# EAGLE board ADK_MEGA_2560-REV3 (EAGLE 7.2.0)
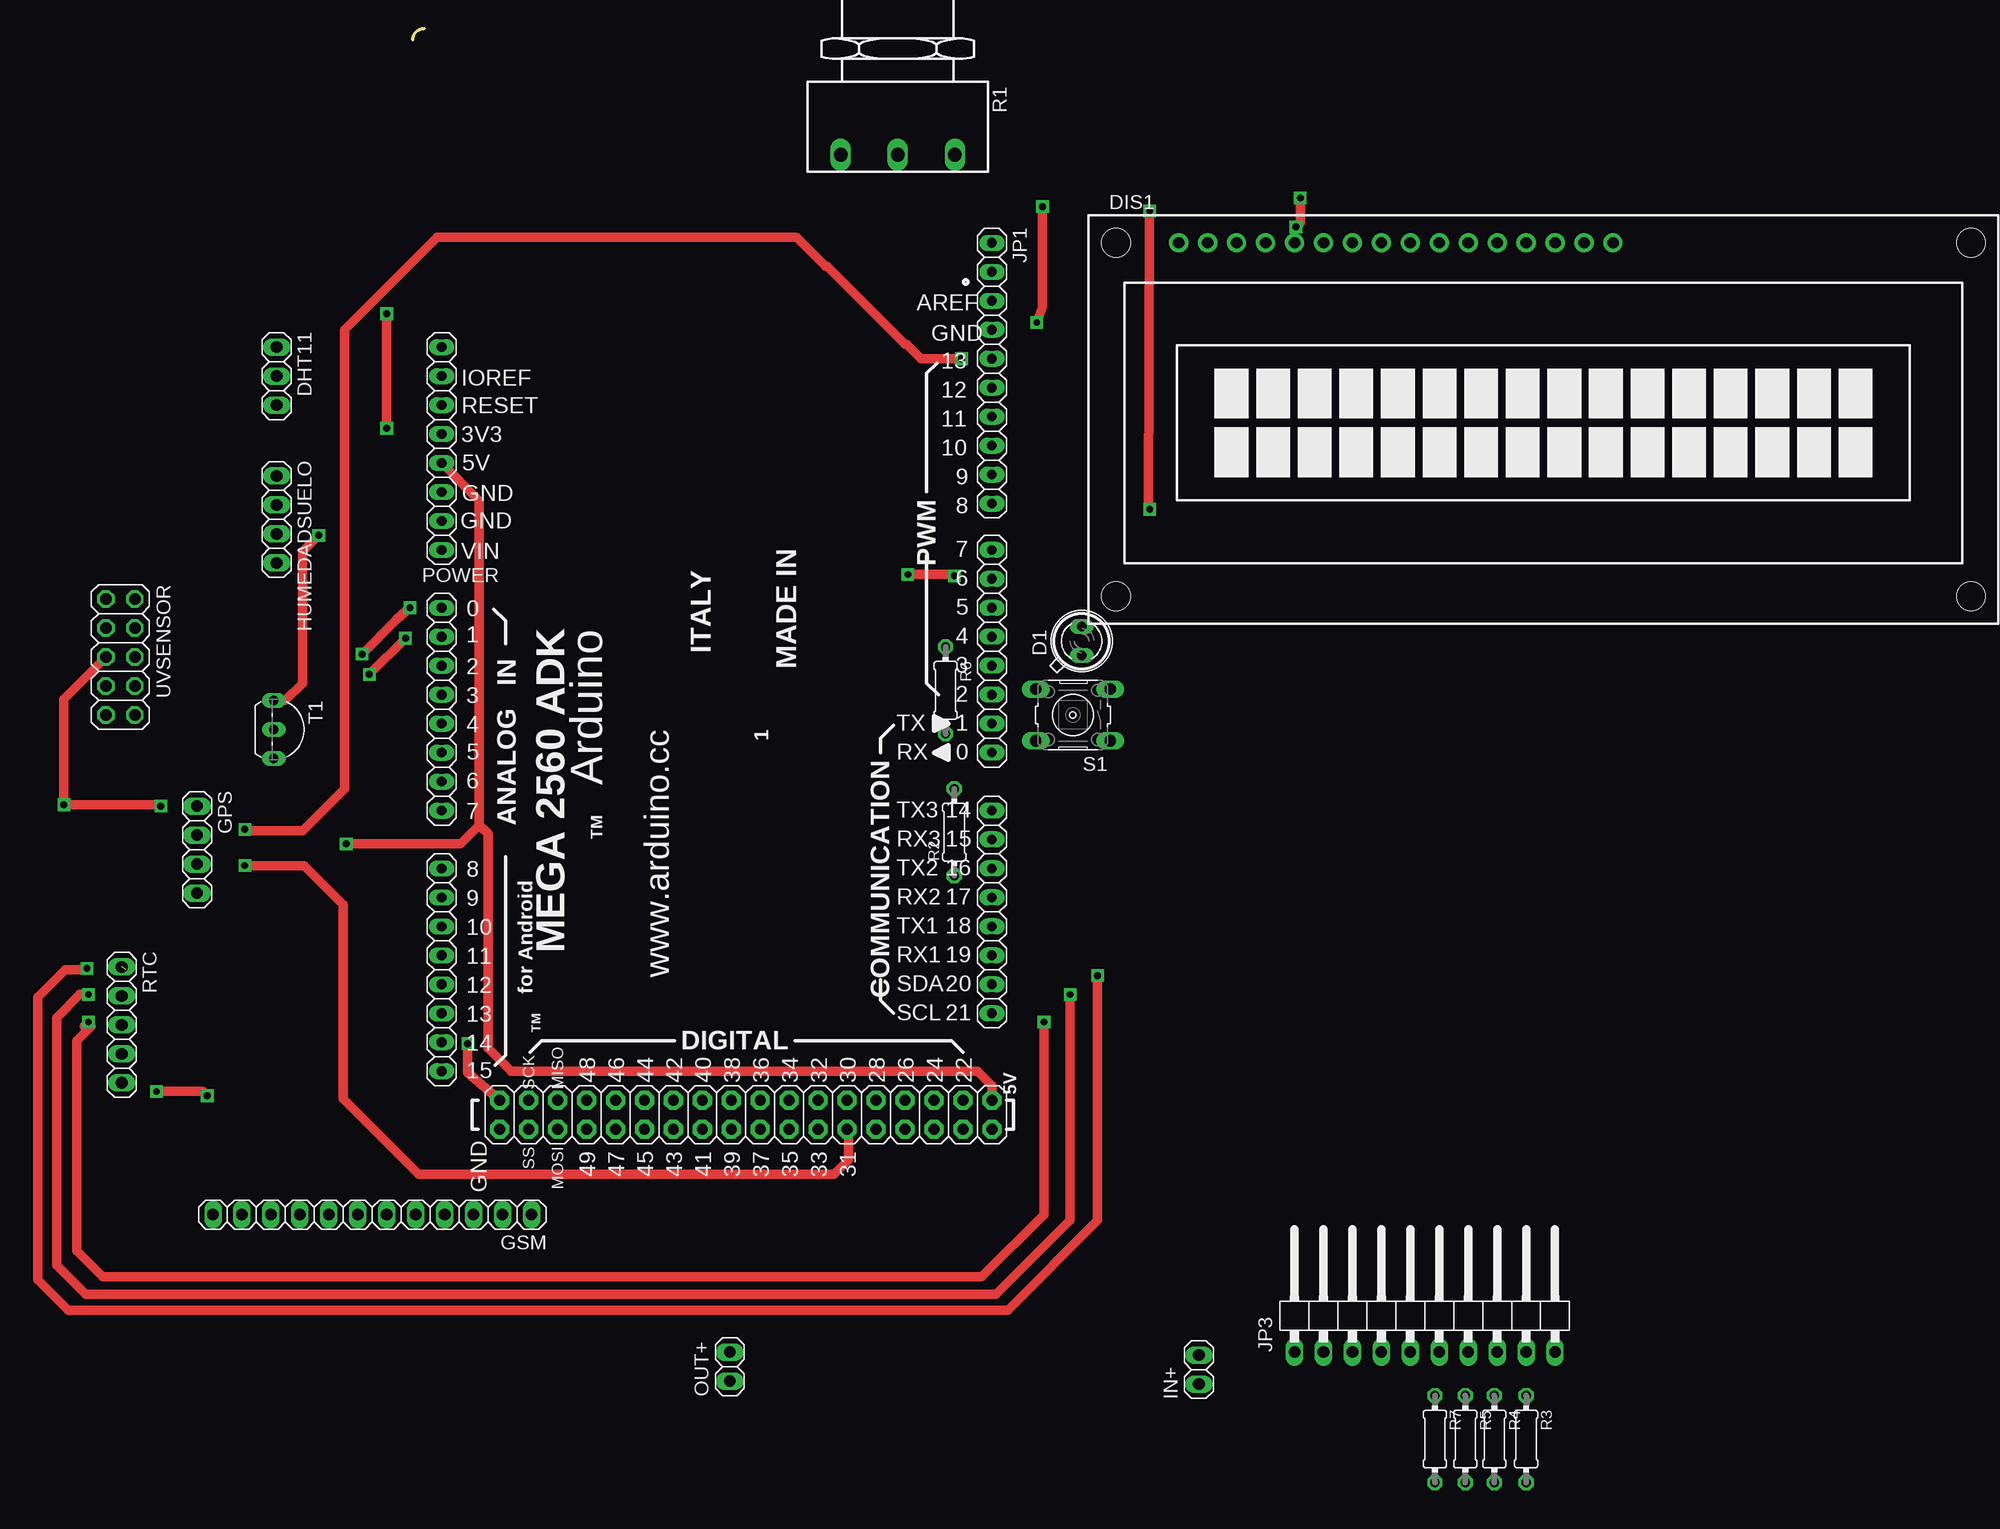
[diagram p0: board, top side]
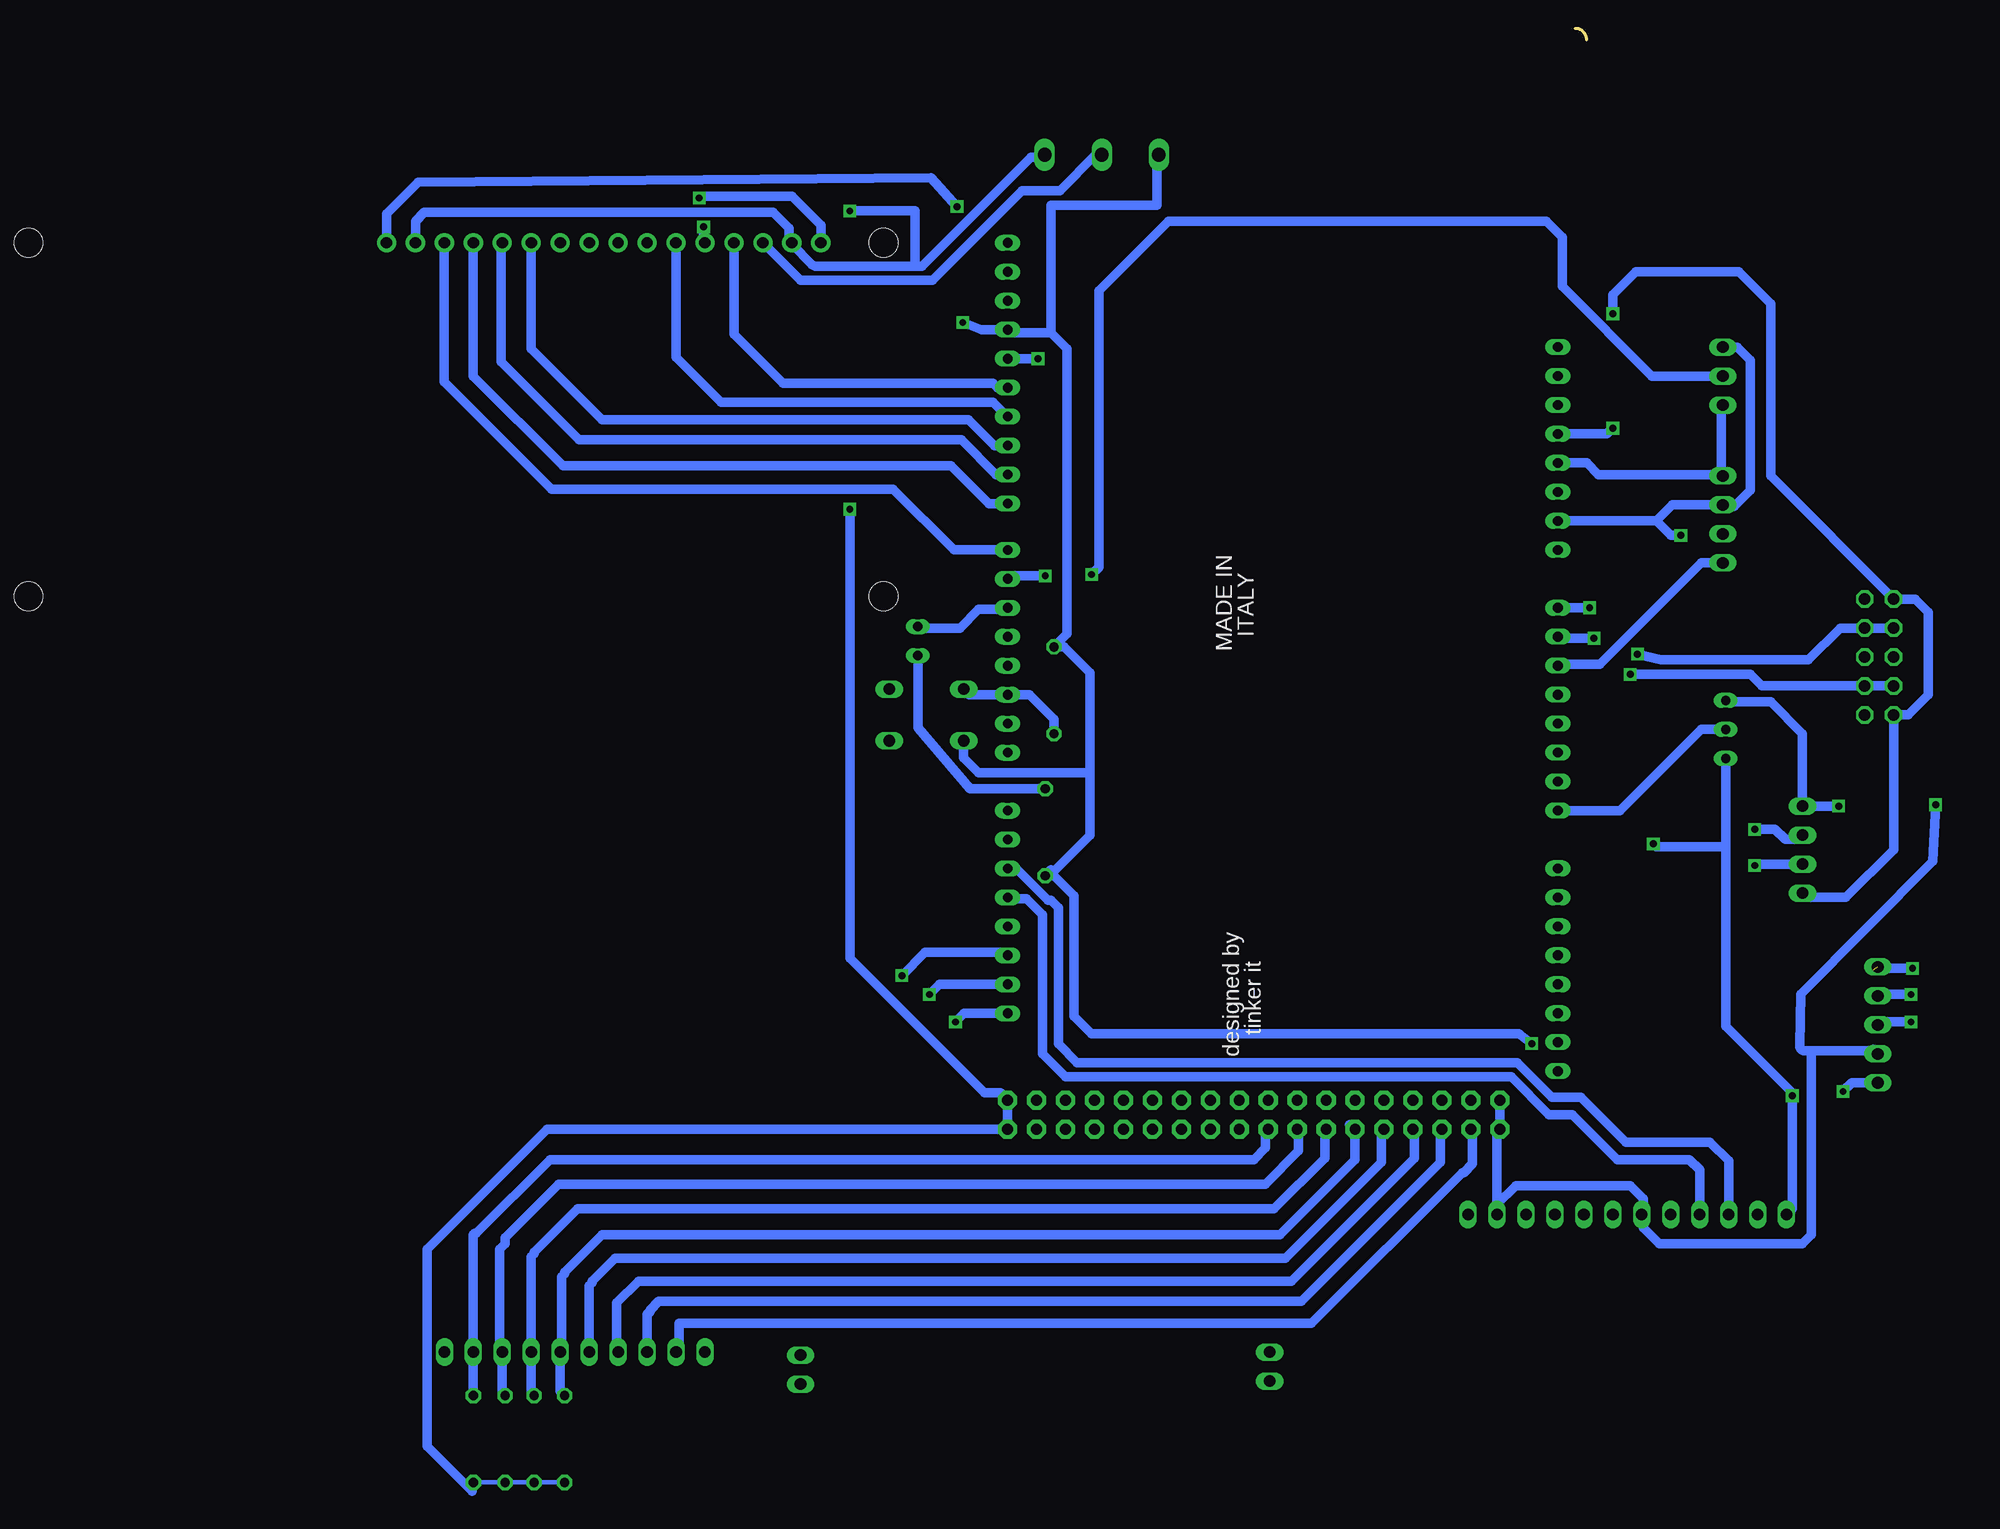
[diagram p1: board, bottom side, seen from below]

Size 1 x 1 mm. Coordinates in mm from the lower left corner, seen from the top.
Outline: 0,0 arc-90 1,1
Copper layers (1*16): Top 0.035mm / dielectric 1.5mm / Bottom 0.035mm
Design rules "ArduinoMegaHOST *": minimum track width 8mil, minimum drill 16mil, track to track 7mil, track to pad 7mil, pad to pad 7mil, via to via 10mil, smd to smd 7mil, copper to edge 20mil, drill to drill 12mil, minimum pad ring 10mil, minimum via ring 10mil, stop-mask expansion 2mil, vias tented up to drill 20mil, thermal gap 10mil
Net classes: 0 default: width 0.203 mm, drill 0.406 mm, clearance 0.178 mm; 1 power: width 0.305 mm, drill 0.406 mm, clearance 0.178 mm; 2 gnd: width 0.305 mm, drill 0.406 mm, clearance 0.178 mm; 3 power usb: width 0.508 mm, drill 0.406 mm, clearance 0.178 mm

## Footprints (pad centres in the part's own frame; a part is rotated, then mirrored left to right if it is on the bottom)
1X08 = drill 0.85 pad 1.422 long: 1 -8.89,0; 2 -6.35,0; 3 -3.81,0; 4 -1.27,0; 5 1.27,0; 6 3.81,0; 7 6.35,0; 8 8.89,0
SFH482 = drill 0.813 long: A -1.27,0; K 1.27,0
1X03 = drill 1.016 long: 1 -2.54,0; 2 0,0; 3 2.54,0
TUXGR_16X2_R2 = drill 1 pad 1.676: 1 -32,15.5; 2 -29.46,15.5; 3 -26.92,15.5; 4 -24.38,15.5; 5 -21.84,15.5; 6 -19.3,15.5; 7 -16.76,15.5; 8 -14.22,15.5; 9 -11.68,15.5; 10 -9.14,15.5; 11 -6.6,15.5; 12 -4.06,15.5; 13 -1.52,15.5; 14 1.02,15.5; 15 3.56,15.5; 16 6.1,15.5 | hole 2.5: -37.5,-15.5; 37.5,-15.5; -37.5,15.5; 37.5,15.5
1X04 = drill 1.016 long: 1 -3.81,0; 2 -1.27,0; 3 1.27,0; 4 3.81,0
1X12 = drill 1.016 long: 1 -13.97,0; 2 -11.43,0; 3 -8.89,0; 4 -6.35,0; 5 -3.81,0; 6 -1.27,0; 7 1.27,0; 8 3.81,0; 9 6.35,0; 10 8.89,0; 11 11.43,0; 12 13.97,0
1X02 = drill 1.016 long: 1 -1.27,0; 2 1.27,0
1X01 = drill 1.016 octagon: 1 0,0
1X10 = drill 0.85 pad 1.422 long: 1 -11.43,0; 2 -8.89,0; 3 -6.35,0; 4 -3.81,0; 5 -1.27,0; 6 1.27,0; 7 3.81,0; 8 6.35,0; 9 8.89,0; 10 11.43,0
1X10/90 = drill 1.016 long: 1 -11.43,-3.81; 2 -8.89,-3.81; 3 -6.35,-3.81; 4 -3.81,-3.81; 5 -1.27,-3.81; 6 1.27,-3.81; 7 3.81,-3.81; 8 6.35,-3.81; 9 8.89,-3.81; 10 11.43,-3.81
PC16S = drill 1.2 long: 1A -5,6.5; 1E 5,6.5; 1S 0,6.5
0204/7 = drill 0.813 octagon: 1 -3.81,0; 2 3.81,0
1X05 = drill 1.016 long: 1 -5.08,0; 2 -2.54,0; 3 0,0; 4 2.54,0; 5 5.08,0
B3F-10XX = drill 1.016 long: 1 -3.251,2.261; 2 3.251,2.261; 3 -3.251,-2.261; 4 3.251,-2.261
TO92-EBC = drill 0.813 long: B 0,-1.27; C 2.54,-1.27; E -2.54,-1.27
2X05 = drill 1.016 octagon: 1 -5.08,-1.27; 2 -5.08,1.27; 3 -2.54,-1.27; 4 -2.54,1.27; 5 0,-1.27; 6 0,1.27; 7 2.54,-1.27; 8 2.54,1.27; 9 5.08,-1.27; 10 5.08,1.27
2X18 = drill 0.95 pad 1.676 octagon: 1 -21.59,-1.27; 2 -21.59,1.27; 3 -19.05,-1.27; 4 -19.05,1.27; 5 -16.51,-1.27; 6 -16.51,1.27; 7 -13.97,-1.27; 8 -13.97,1.27; 9 -11.43,-1.27; 10 -11.43,1.27; 11 -8.89,-1.27; 12 -8.89,1.27; 13 -6.35,-1.27; 14 -6.35,1.27; 15 -3.81,-1.27; 16 -3.81,1.27; 17 -1.27,-1.27; 18 -1.27,1.27; 19 1.27,-1.27; 20 1.27,1.27; 21 3.81,-1.27; 22 3.81,1.27; 23 6.35,-1.27; 24 6.35,1.27; 25 8.89,-1.27; 26 8.89,1.27; 27 11.43,-1.27; 28 11.43,1.27; 29 13.97,-1.27; 30 13.97,1.27; 31 16.51,-1.27; 32 16.51,1.27; 33 19.05,-1.27; 34 19.05,1.27; 35 21.59,-1.27; 36 21.59,1.27

## Placement (x,y rotation side)
ADCH  8x1F-H8.5  [1X08]  2.54,-81.55 270 top  (outside the outline)
ADCL  8x1F-H8.5  [1X08]  2.54,-58.69 270 top  (outside the outline)
COMMUNICATION  8x1F-H8.5  [1X08]  50.8,-76.47 90 top  (outside the outline)
D1  SFH482  [SFH482]  58.67,-52.72 90 top  (outside the outline)
DHT11  [1X03]  -11.94,-29.48 270 top  (outside the outline)
DIS1  TUXGR_16X2_R2  [TUXGR_16X2_R2]  99.19,-33.29 0 top  (outside the outline)
GPS  [1X04]  -18.92,-71.01 270 top  (outside the outline)
GSM  [1X12]  -3.56,-103.01 180 top  (outside the outline)
HUMEDADSUELO  [1X04]  -11.94,-42.05 270 top  (outside the outline)
IN+  [1X02]  68.96,-116.6 90 top  (outside the outline)
IN-  [1X01]  68.83,-135.52 0 top  (outside the outline)
IN--  [1X02]  27.69,-137.05 90 top  (outside the outline)
JP1  10x1F-H8.5  [1X10]  50.8,-29.23 270 top  (outside the outline)
JP3  [1X10/90]  88.77,-111.27 0 top  (outside the outline)
OUT+  [1X02]  27.81,-116.35 90 top  (outside the outline)
POWER  8x1F-H8.5  [1X08]  2.54,-35.83 270 top  (outside the outline)
PWML  8x1F-H8.5  [1X08]  50.8,-53.61 90 top  (outside the outline)
R1  PC16S  [PC16S]  42.55,-3.57 180 top  (outside the outline)
R2  [0204/7]  47.5,-69.48 90 top  (outside the outline)
R3  [0204/7]  97.66,-122.7 270 top  (outside the outline)
R4  [0204/7]  94.87,-122.7 270 top  (outside the outline)
R5  [0204/7]  92.33,-122.7 270 top  (outside the outline)
R6  [0204/7]  46.74,-57.04 270 top  (outside the outline)
R7  [0204/7]  89.66,-122.7 270 top  (outside the outline)
RTC  [1X05]  -25.53,-86.38 270 top  (outside the outline)
S1  [B3F-10XX]  57.91,-59.2 180 top  (outside the outline)
T1  [TO92-EBC]  -10.92,-60.47 270 top  (outside the outline)
UVSENSOR  [2X05]  -25.65,-54.12 270 top  (outside the outline)
XIO  18x2F-H8.5  [2X18]  29.21,-94.25 180 top  (outside the outline)

## Library data of the parts
ADCH ADCL COMMUNICATION JP1 POWER PWML XIO = SmartPrj
D1 = led
DHT11 GPS GSM HUMEDADSUELO IN+ IN- IN-- JP3 OUT+ RTC UVSENSOR = pinhead
DIS1 = display-lcd; OC_FARNELL: unknown; OC_NEWARK: unknown
R1 = piher; OC_FARNELL: 4452940; OC_NEWARK: unknown
R2-R7 = eagle-ltspice; SPICEMODEL: NONE; SPICEPREFIX: R
S1 = switch-omron; MPN: B3F-1000; OC_FARNELL: 176432; OC_NEWARK: 36M3542
T1 = transistor-neu-to92

## Nets
GND: DHT11.1 DIS1.16 GPS.1 GSM.2 GSM.7 HUMEDADSUELO.2 JP1.4 POWER.7 R1.1E R2.1 R6.1 RTC.4 S1.2 T1.E UVSENSOR.5 XIO.35 XIO.36
N$1: DIS1.3 R1.1S
N$2: D1.K PWML.6
N$3: D1.A R2.2
N$4: DIS1.14 PWML.8
N$5: DIS1.1 DIS1.5
N$6: DIS1.13 JP1.10
N$7: DIS1.12 JP1.9
N$8: DIS1.11 JP1.8
N$9: DIS1.6 JP1.7
N$10: DIS1.4 JP1.6
N$11: GPS.2 JP1.5
N$12: DHT11.2 PWML.7
N$13: GPS.3 XIO.12
N$14: COMMUNICATION.1 RTC.3
N$15: COMMUNICATION.2 RTC.2
N$16: COMMUNICATION.3 RTC.1
N$17: ADCL.3 HUMEDADSUELO.4
N$18: ADCL.8 T1.B
N$19: ADCL.2 UVSENSOR.7
N$20: ADCL.1 UVSENSOR.3
N$21: PWML.3 R6.2 S1.4
N$22: COMMUNICATION.6 GSM.10
N$23: COMMUNICATION.5 GSM.9
N$24: JP3.9 R3.1 XIO.20
N$25: JP3.8 R4.1 XIO.22
N$26: JP3.7 R5.1 XIO.24
N$27: JP3.6 R7.1 XIO.26
N$29: GPS.4 POWER.4 UVSENSOR.1 UVSENSOR.9
N$30: JP3.5 XIO.28
N$31: JP3.4 XIO.30
N$32: JP3.3 XIO.32
N$33: JP3.2 XIO.34
VCC: DHT11.3 DIS1.2 DIS1.15 GSM.12 HUMEDADSUELO.1 POWER.5 R1.1A R3.2 R4.2 R5.2 R7.2 RTC.5 T1.C XIO.1 XIO.2

## Tracks (layer width: path | path; a pad name or v marks a point on that pad's centre or on a via)
GND  (via drill 0.6)
  Top 0.813: v-22.1,-67.2 -22.23,-67.07 v-30.61,-67.07 -30.61,-57.8 UVSENSOR.5 | v-8.25,-43.45 -9.65,-44.85 -9.65,-56.4 -11.18,-57.93 T1.E | XIO.35 4.83,-90.57 v4.83,-88.03 | v55.25,-14.62 55.25,-23.38 v54.74,-24.78
  Bottom 0.813: XIO.35 XIO.36 7.87,-95.77 GSM.2 7.87,-102.12 6.22,-100.47 -3.81,-100.47 -4.95,-101.62 -4.95,-102.89 | DIS1.16 105.29,-15.26 102.49,-12.46 57.53,-12.08 v55.25,-14.62 | 43.56,-64.28 43.56,-55.51 45.85,-53.23 R6.1 45.59,-52.09 45.59,-27.07 46.99,-25.67 | 43.56,-64.28 43.56,-69.74 46.99,-73.17 46.99,-72.79 R2.1 46.74,-73.29 44.96,-75.07 44.96,-85.61 43.43,-87.14 5.97,-87.14 v4.83,-88.03 | S1.2 54.66,-62.96 53.34,-64.28 43.56,-64.28 | -4.95,-102.89 GSM.7 | -4.95,-102.89 -4.95,-104.16 -6.35,-105.55 -18.92,-105.55 -19.69,-104.79 -19.69,-88.79 arc-90 -19.56,-88.66 | -25.15,-88.53 RTC.4 -25.53,-88.66 -19.56,-88.66 | 46.99,-25.67 51.05,-25.67 JP1.4 53.09,-25.42 v54.74,-24.78 | POWER.7 -6.1,-42.18 | -6.1,-42.18 -7.49,-40.78 HUMEDADSUELO.2 -12.07,-40.91 -12.95,-40.91 -14.35,-39.51 -14.35,-28.08 -13.21,-26.94 DHT11.1 | T1.E -12.32,-58.05 -16.13,-58.05 -18.92,-60.85 GPS.1 v-22.1,-67.2 | v-30.61,-67.07 -30.35,-72.02 -18.8,-83.71 -18.67,-88.15 arc-90 -19.18,-88.66 -19.56,-88.66 | -6.1,-42.18 -7.37,-43.45 v-8.25,-43.45 | R1.1E 37.72,-10.07 37.72,-14.49 46.99,-14.49 46.99,-25.67
N$1
  Bottom 0.813: DIS1.3 68.96,-21.1 57.4,-21.1 49.53,-13.22 46.23,-13.22 43.08,-10.07 R1.1S
N$2
  Bottom 0.813: PWML.6 50.93,-49.93 53.34,-49.93 54.99,-51.58 58.55,-51.58 D1.K
N$3
  Bottom 0.813: D1.A 58.67,-60.34 54.1,-65.67 R2.2
N$4
  Bottom 0.813: DIS1.14 100.21,-29.98 90.81,-39.39 60.83,-39.39 55.5,-44.72 PWML.8
N$5  (via drill 0.6)
  Top 0.813: v77.85,-13.86 77.85,-16.02 v77.47,-16.4
  Bottom 0.813: DIS1.5 77.47,-17.67 v77.47,-16.4 | DIS1.1 67.19,-16.27 69.72,-13.73 77.72,-13.73 v77.85,-13.86
N$6
  Bottom 0.813: JP1.10 52.45,-40.66 55.75,-37.35 89.79,-37.35 97.66,-29.48 DIS1.13
N$7
  Bottom 0.813: JP1.9 51.82,-38.12 54.86,-35.07 88.39,-35.07 95.25,-28.21 95.25,-17.91 DIS1.12
N$8
  Bottom 0.813: JP1.8 51.94,-35.58 54.23,-33.29 86.36,-33.29 92.58,-27.07 DIS1.11
N$9
  Bottom 0.813: DIS1.6 79.89,-27.82 75.95,-31.77 52.07,-31.77 JP1.7
N$10
  Bottom 0.813: JP1.6 51.69,-30.5 52.07,-30.11 70.48,-30.11 74.81,-25.79 DIS1.4
N$11  (via drill 0.6)
  Top 0.813: v48.13,-27.96 44.58,-27.96 43.31,-26.69 43.18,-26.69 36.32,-19.83 36.2,-19.83 33.66,-17.29 2.16,-17.29 -5.97,-25.42 -5.97,-65.67 -9.65,-69.36 -14.61,-69.36 v-14.73,-69.23
  Bottom 0.813: JP1.5 v48.13,-27.96 | v-14.73,-69.23 -16.51,-69.23 -17.4,-70.12 -18.54,-70.12 GPS.2
N$12  (via drill 0.6)
  Top 0.813: v43.43,-46.88 47.37,-46.88 v47.5,-47.01
  Bottom 0.813: DHT11.2 -5.71,-29.48 2.16,-21.61 2.16,-17.29 3.56,-15.89 36.7,-15.89 42.8,-21.99 42.8,-46.24 v43.43,-46.88 | v47.5,-47.01 50.55,-47.01 PWML.7
N$13  (via drill 0.6)
  Top 0.813: v-14.73,-72.41 -9.53,-72.41 -6.1,-75.83 -6.1,-92.85 0.51,-99.46 36.96,-99.46 38.23,-98.19 38.23,-95.65 XIO.12
  Bottom 0.813: GPS.3 -14.86,-72.28 v-14.73,-72.41
N$14  (via drill 0.6)
  Top 0.813: v55.37,-86.12 55.37,-103.01 49.91,-108.47 -27.18,-108.47 -29.46,-106.19 -29.46,-87.77 -28.19,-86.5 -28.83,-86.5 v-28.45,-86.12
  Bottom 0.813: COMMUNICATION.1 54.61,-85.36 v55.37,-86.12 | v-28.45,-86.12 -25.78,-86.12 RTC.3
N$15  (via drill 0.6)
  Top 0.813: v57.66,-83.71 57.66,-103.52 51.18,-110 -28.7,-110 -31.24,-107.46 -31.24,-85.74 -29.21,-83.71 v-28.45,-83.71
  Bottom 0.813: COMMUNICATION.2 56.77,-82.82 v57.66,-83.71 | v-28.45,-83.71 -25.65,-83.71 RTC.2
N$16  (via drill 0.6)  (1 unrouted)
  Top 0.813: v60.07,-82.06 60.07,-103.52 52.2,-111.39 -30.23,-111.39 -32.89,-108.73 -32.89,-83.96 -30.48,-81.55 -28.7,-81.55 v-28.57,-81.42
  Bottom 0.813: COMMUNICATION.3 51.05,-80.03 58.04,-80.03 v60.07,-82.06 | v-28.57,-81.42 -25.27,-81.42 -25.15,-81.55
N$17
  Bottom 0.813: HUMEDADSUELO.4 -10.03,-45.86 -1.14,-54.75 2.41,-54.75 ADCL.3
N$18
  Bottom 0.813: ADCL.8 -2.92,-67.58 -10.03,-60.47 T1.B
N$19  (via drill 0.6)
  Top 0.813: v-3.81,-55.64 v-0.64,-52.47
  Bottom 0.61: 2.67,-52.47 ADCL.2
  Bottom 0.813: UVSENSOR.7 -15.37,-56.66 -14.35,-55.64 v-3.81,-55.64 | v-0.64,-52.47 2.41,-52.47 ADCL.2
N$20  (via drill 0.6)
  Top 0.813: v-4.45,-53.86 -1.4,-50.82 v-0.25,-49.8
  Bottom 0.813: UVSENSOR.3 -22.23,-51.58 -19.43,-54.37 -6.48,-54.37 v-4.45,-53.86 | v-0.25,-49.8 ADCL.1
N$21
  Bottom 0.813: R6.2 46.74,-59.58 48.9,-57.42 PWML.3 54.18,-57.42 S1.4
N$22
  Bottom 0.813: GSM.10 -12.45,-98.31 -10.79,-96.66 -3.43,-96.66 0.51,-92.73 3.05,-92.73 6.1,-89.68 44.7,-89.68 46.36,-88.03 46.36,-76.09 46.99,-75.45 47.24,-75.45 50.16,-72.53 50.67,-72.53 COMMUNICATION.6
N$23
  Bottom 0.813: GSM.9 -9.91,-99.08 -9.02,-98.19 -2.67,-98.19 1.27,-94.25 3.3,-94.25 6.6,-90.95 45.72,-90.95 47.75,-88.92 47.75,-76.72 49.15,-75.33 50.67,-75.33 COMMUNICATION.5
N$24
  Bottom 0.813: XIO.20 28.19,-95.77 28.19,-97.17 29.21,-98.19 90.93,-98.19 97.41,-104.66 97.54,-104.66 97.66,-104.79 JP3.9 R3.1
N$25
  Bottom 0.813: XIO.22 25.27,-95.65 25.27,-97.42 28.19,-100.35 90.17,-100.35 94.87,-105.04 94.87,-105.55 95.38,-106.06 95.38,-114.82 JP3.8 95.12,-118.63 R4.1
N$26
  Bottom 0.813: XIO.24 22.99,-95.65 22.99,-98.06 27.43,-102.5 88.52,-102.5 92.33,-106.31 92.33,-106.44 92.58,-106.7 JP3.7 92.58,-118.63 R5.1
N$27
  Bottom 0.813: XIO.26 20.7,-95.14 20.83,-95.14 20.32,-95.65 20.32,-98.19 26.92,-104.79 86.36,-104.79 89.66,-108.09 89.66,-108.22 89.92,-108.47 89.92,-114.95 JP3.6 90.04,-118.51 R7.1
N$29  (via drill 0.6)
  Top 0.813: v-2.29,-24.02 v-2.29,-34.05
  Bottom 0.813: GPS.4 -19.3,-75.2 -22.73,-75.2 -26.92,-71.01 UVSENSOR.9 -28.19,-59.2 -29.97,-57.42 -29.97,-50.18 -28.83,-49.04 UVSENSOR.1 -16.13,-38.24 -16.13,-23.13 -13.34,-20.34 -4.32,-20.34 -2.29,-22.37 v-2.29,-24.02 | v-2.29,-34.05 -1.78,-34.56 POWER.4
N$30
  Bottom 0.813: XIO.28 18.03,-95.77 18.03,-98.44 26.42,-106.82 85.22,-106.82 87.25,-108.85 87.25,-108.98 87.5,-109.24 JP3.5
N$31
  Bottom 0.813: XIO.30 15.11,-95.65 15.11,-98.06 25.91,-108.85 83.19,-108.85 85.09,-110.76 85.09,-114.95 JP3.4
N$32
  Bottom 0.813: XIO.32 12.83,-95.65 12.83,-98.44 25.02,-110.63 81.41,-110.63 82.17,-111.39 82.17,-111.52 82.42,-111.78 JP3.3
N$33
  Bottom 0.813: XIO.34 10.03,-95.65 10.03,-98.57 10.8,-99.33 10.92,-99.33 24.13,-112.54 79.63,-112.54 79.63,-114.82 JP3.2
VCC  (via drill 0.6)
  Top 0.813: v64.64,-15 64.52,-41.04 v64.64,-41.16 | v-22.48,-92.22 -18.41,-92.22 v-18.03,-92.6 | POWER.5 5.84,-40.4 5.84,-68.85 | 5.84,-68.85 4.19,-70.5 v-5.84,-70.5 | 5.84,-68.85 6.6,-69.61 6.6,-88.41 8.64,-90.44 49.53,-90.44 50.8,-91.71 XIO.1
  Bottom 0.406: R3.2 R4.2 R5.2 R7.2
  Bottom 0.813: DIS1.15 102.75,-15.89 101.98,-15.13 71.37,-15.13 69.98,-16.53 69.98,-17.54 DIS1.2 69.73,-17.92 67.95,-19.7 67.69,-19.83 58.93,-19.83 | R3.2 97.79,-126.63 97.79,-127.27 101.73,-123.33 101.73,-106.06 91.19,-95.52 XIO.2 XIO.1 51.44,-92.34 52.83,-92.34 64.64,-80.53 v64.64,-41.16 | T1.C -12.19,-70.75 | -12.19,-70.75 -12.19,-86.5 -18.03,-92.34 v-18.03,-92.6 -18.03,-102.5 GSM.12 | RTC.5 -23.24,-91.46 v-22.48,-92.22 | DHT11.3 -11.81,-32.15 -11.81,-37.86 -11.94,-37.99 HUMEDADSUELO.1 -11.81,-38.12 -1.02,-38.12 0,-37.1 POWER.5 | v-5.84,-70.5 -6.1,-70.75 -12.19,-70.75 | R1.1A 47.55,-10.22 47.62,-10.3 48.77,-10.3 58.29,-19.83 58.93,-19.83 | v64.64,-15 58.93,-15 58.93,-19.83

## Text on the board
tNames: AREF | GND | 13 | IOREF | 12 | RESET | 11 | 3V3 | 10 | 5V | 9 | GND | PWM | 8 | GND | MADE IN | 7 | VIN | ITALY | 6 | 5 | 0 | MEGA 2560 ADK | Arduino | 1 | 4 | ANALOG IN | 2 | 3 | 3 | 2 | www.arduino.cc | 4 | 1 | TX | 1 | 5 | RX | 0 | 6 | 7 | TM | TX3 | 14 | RX3 | 15 | 8 | TX2 | 16 | for Android | 9 | RX2 | 17 | TX1 | 18 | 10 | 11 | RX1 | 19 | SDA | 20 | 12 | TM | 13 | SCL | 21 | MISO | 14 | SCK | 48 | 46 | 44 | 42 | DIGITAL | 40 | 38 | 36 | 34 | 32 | 30 | 28 | 26 | 24 | 22 | 15 | 5V | GND | SS | MOSI | 49 | 47 | 45 | 43 | 41 | 39 | 37 | 35 | 33 | 31
bNames: ITALY | MADE IN | tinker it | designed by